# EAGLE board card (EAGLE 9.6.2)
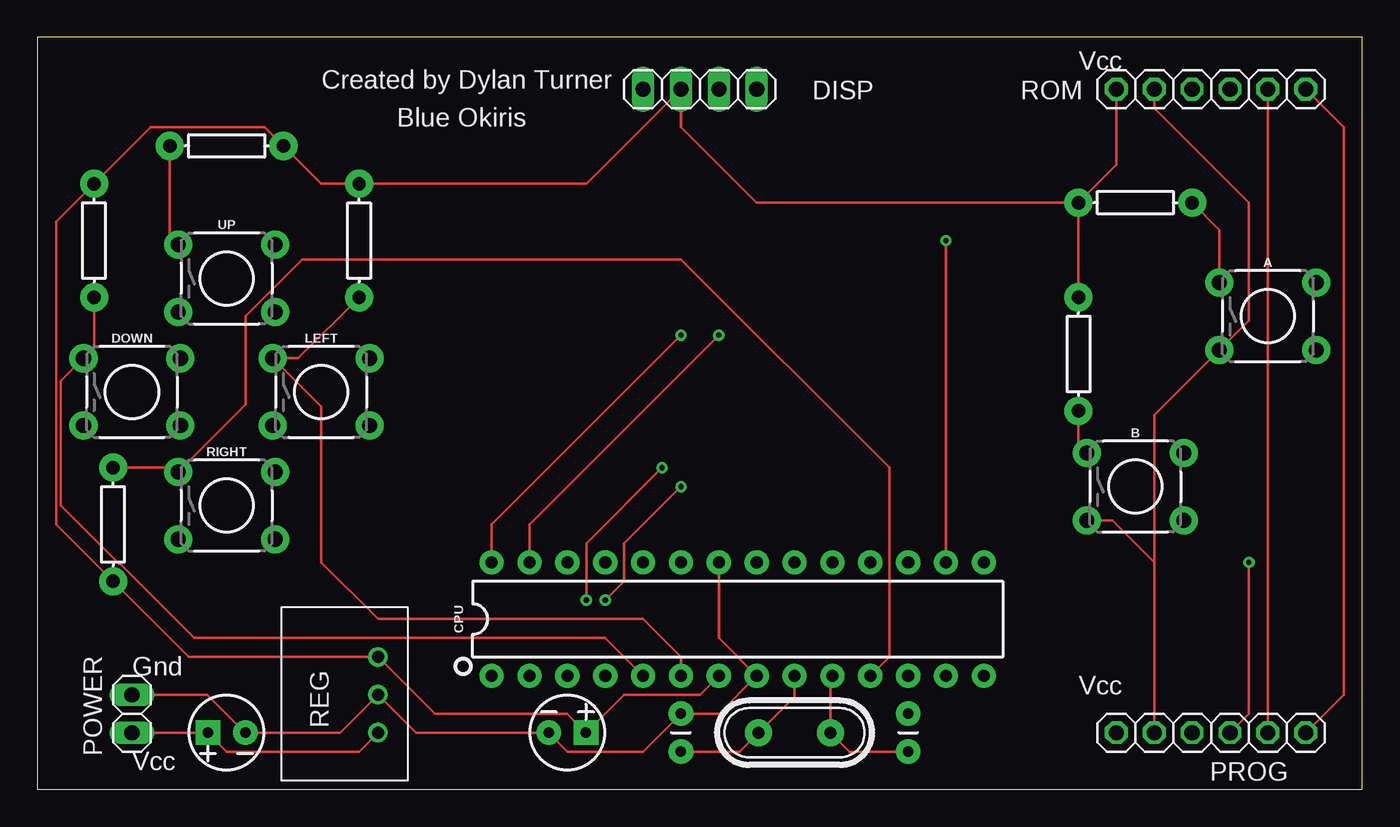
[diagram p0: board, top side]
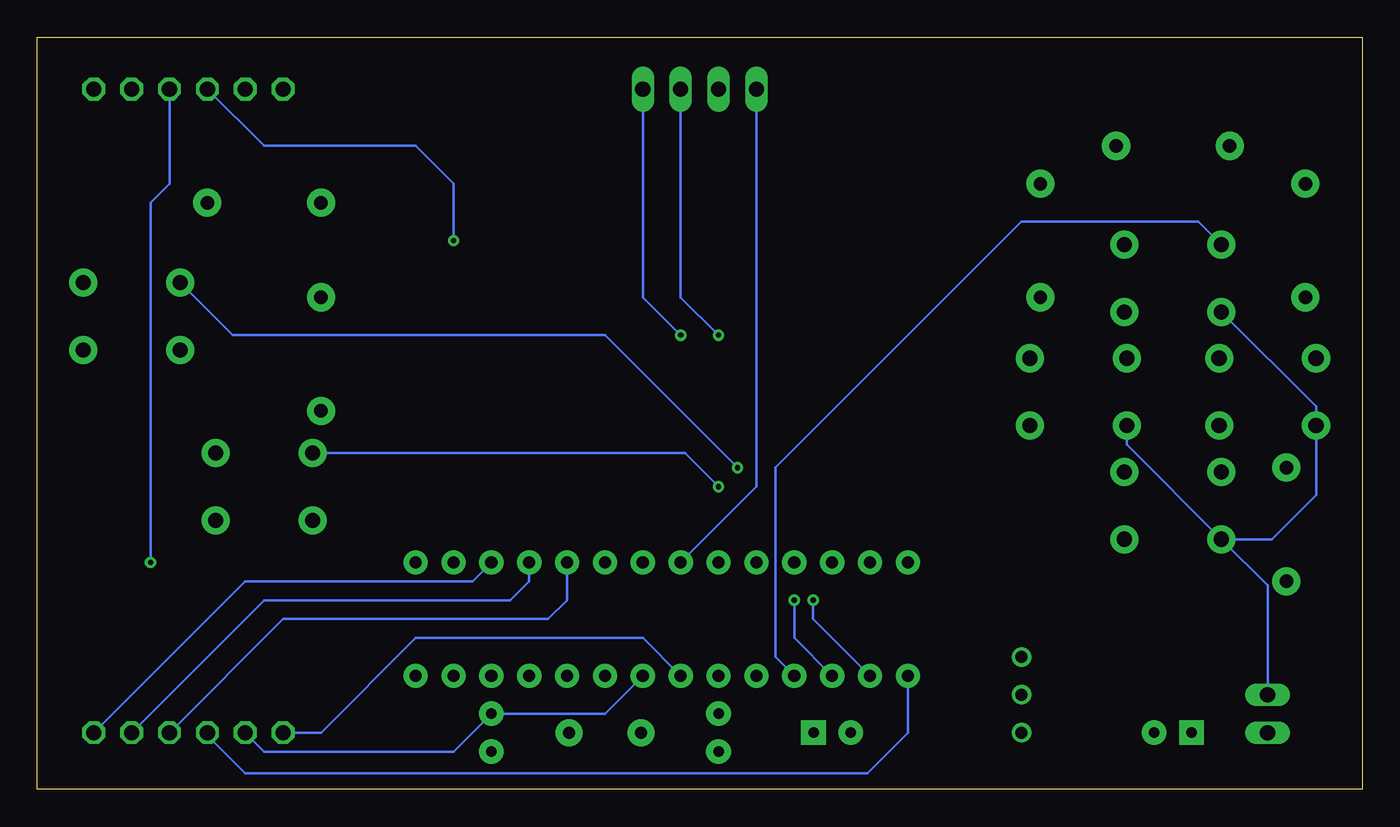
[diagram p1: board, bottom side, seen from below]

Size 88.88 x 50.47 mm. Coordinates in mm from the lower left corner, seen from the top.
Outline: 0,0 88.88,0 88.88,50.47 0,50.47 0,0
Copper layers (1*16): Top 0.035mm / dielectric 1.5mm / Bottom 0.035mm
Design rules "default": minimum track width 6mil, minimum drill 0.35mm, track to track 6mil, track to pad 6mil, pad to pad 6mil, via to via 6mil, smd to smd 6mil, copper to edge 40mil, drill to drill 6mil, minimum pad ring 10mil, minimum via ring 8mil, stop-mask expansion 4mil, vias tented up to drill 0mil, thermal gap 10mil

## Footprints (pad centres in the part's own frame; a part is rotated, then mirrored left to right if it is on the bottom)
TACTILE_SWITCH_PTH_6.0MM = drill 1.016 pad 1.88: 1 -3.251,2.261; 2 3.251,2.261; 3 -3.251,-2.261; 4 3.251,-2.261
CPOL-RADIAL-2.5MM-5MM = drill 0.7 pad 1.651 square: 1 1.25,0 | drill 0.7 pad 1.651: 2 -1.25,0
CAP-PTH-2.54 = drill 0.7 pad 1.651: 1 -1.27,0; 2 1.27,0
DIP28 = drill 0.813 pad 1.626: 1 -16.51,-3.81; 2 -13.97,-3.81; 3 -11.43,-3.81; 4 -8.89,-3.81; 5 -6.35,-3.81; 6 -3.81,-3.81; 7 -1.27,-3.81; 8 1.27,-3.81; 9 3.81,-3.81; 10 6.35,-3.81; 11 8.89,-3.81; 12 11.43,-3.81; 13 13.97,-3.81; 14 16.51,-3.81; 15 16.51,3.81; 16 13.97,3.81; 17 11.43,3.81; 18 8.89,3.81; 19 6.35,3.81; 20 3.81,3.81; 21 1.27,3.81; 22 -1.27,3.81; 23 -3.81,3.81; 24 -6.35,3.81; 25 -8.89,3.81; 26 -11.43,3.81; 27 -13.97,3.81; 28 -16.51,3.81
1X04 = drill 1.016 long: 1 -3.81,0; 2 -1.27,0; 3 1.27,0; 4 3.81,0
1X02 = drill 1.016 long: 1 -1.27,0; 2 1.27,0
1X06 = drill 1.016 octagon: 1 -6.35,0; 2 -3.81,0; 3 -1.27,0; 4 1.27,0; 5 3.81,0; 6 6.35,0
AXIAL-0.3 = drill 0.9 pad 1.88: P$1 -3.81,0; P$2 3.81,0
DC-DC_CONVERTER_78XX = drill 0.8: GND 0,0; VIN -2.54,0; VOUT 2.54,0
HC49 = drill 0.813 pad 1.8: 1 -2.413,0; 2 2.413,0

## Placement (x,y rotation side)
A  MOMENTARY-SWITCH-SPST-PTH-6.0MM  [TACTILE_SWITCH_PTH_6.0MM]  82.55,31.75 0 top
B  MOMENTARY-SWITCH-SPST-PTH-6.0MM  [TACTILE_SWITCH_PTH_6.0MM]  73.66,20.32 0 top
C1  10uF  [CPOL-RADIAL-2.5MM-5MM]  35.56,3.81 0 top
C2  10uF  [CPOL-RADIAL-2.5MM-5MM]  12.7,3.81 180 top
C3  22pF  [CAP-PTH-2.54]  58.42,3.81 90 top
C4  22pF  [CAP-PTH-2.54]  43.18,3.81 90 top
CPU  328P  [DIP28]  46.99,11.43 0 top
DISP  [1X04]  44.45,46.99 0 top
DOWN  MOMENTARY-SWITCH-SPST-PTH-6.0MM  [TACTILE_SWITCH_PTH_6.0MM]  6.35,26.67 0 top
LEFT  MOMENTARY-SWITCH-SPST-PTH-6.0MM  [TACTILE_SWITCH_PTH_6.0MM]  19.05,26.67 0 top
POWER  [1X02]  6.35,5.08 270 top
PROG  [1X06]  78.74,3.81 0 top
R1  1k  [AXIAL-0.3]  5.08,17.78 270 top
R2  1k  [AXIAL-0.3]  21.59,36.83 90 top
R3  1k  [AXIAL-0.3]  3.81,36.83 90 top
R4  1k  [AXIAL-0.3]  12.7,43.18 0 top
R5  1k  [AXIAL-0.3]  69.85,29.21 90 top
R6  1k  [AXIAL-0.3]  73.66,39.37 180 top
REG  R-78E5.0-1.0  [DC-DC_CONVERTER_78XX]  22.86,6.35 90 top
RIGHT  MOMENTARY-SWITCH-SPST-PTH-6.0MM  [TACTILE_SWITCH_PTH_6.0MM]  12.7,19.05 0 top
ROM  [1X06]  78.74,46.99 0 top
UP  MOMENTARY-SWITCH-SPST-PTH-6.0MM  [TACTILE_SWITCH_PTH_6.0MM]  12.7,34.29 0 top
X1  CRYSTALS-NOGND-HC49  [HC49]  50.8,3.81 180 top

## Library data of the parts
A B DOWN LEFT RIGHT UP = SparkFun-Switches; PROD_ID: SWCH-08441; SF_SKU: COM-00097
C1 C2 = SparkFun-Capacitors; PROD_ID: CAP-08440
C3 C4 = SparkFun-Capacitors; PROD_ID: CAP-09128
CPU = SparkFun-IC-Microcontroller; PROD_ID: IC-09136
DISP POWER = pinhead
PROG ROM = adafruit
R1-R6 = SparkFun-Resistors; PROD_ID: RES-08380
REG = SparkFun-IC-Power; PROD_ID: COM-13655
X1 = IQD-Frequency-Products

## Nets
GND: A.3 B.3 C1.2 C2.2 C3.2 C4.2 CPU.8 CPU.22 DISP.1 DOWN.3 LEFT.3 POWER.1 PROG.2 REG.GND RIGHT.3 ROM.2 UP.3
N$1: CPU.17 PROG.6 ROM.6
N$2: CPU.18 PROG.5 ROM.5
N$3: CPU.19 PROG.4 ROM.4
N$4: CPU.1 PROG.3
N$5: A.1 CPU.2 R6.P$1
N$6: C2.1 POWER.2 REG.VIN
N$7: CPU.16 ROM.3
N$8: CPU.28 DISP.3
N$9: CPU.27 DISP.4
N$10: C4.1 CPU.9 X1.2
N$11: B.1 CPU.3 R5.P$1
N$12: CPU.4 R4.P$1 UP.1
N$13: CPU.5 DOWN.1 R3.P$1
N$14: CPU.6 LEFT.1 R2.P$1
N$15: CPU.11 R1.P$1 RIGHT.1
N$16: C3.1 CPU.10 X1.1
VCC: C1.1 CPU.7 DISP.2 PROG.1 R1.P$2 R2.P$2 R3.P$2 R4.P$2 R5.P$2 R6.P$2 REG.VOUT ROM.1

## Tracks (layer width: path | path; a pad name or v marks a point on that pad's centre or on a via)
GND
  Top 0.152: POWER.1 11.41,6.35 C2.2 20.32,3.81 REG.GND 25.4,3.81 C1.2 34.31,3.79 35.56,2.54 40.64,2.54 C4.2 45.72,5.08 CPU.8 45.72,10.16 CPU.22 | PROG.2 74.93,15.24 | 74.93,15.24 72.11,18.06 B.3 | 74.93,15.24 74.93,25.12 A.3 81.28,31.47 81.28,39.37 74.93,45.72 ROM.2
  Bottom 0.152: CPU.8 50.8,5.08 C3.2 60.96,2.54 73.66,2.54 PROG.2 | RIGHT.3 6.35,13.69 POWER.1 | RIGHT.3 15.8,23.14 LEFT.3 | RIGHT.3 6.07,16.79 3.1,19.76 DOWN.3 3.1,25.68 UP.3 | CPU.22 40.64,20.32 DISP.1
N$1
  Top 0.152: ROM.6 87.63,44.45 87.63,6.35 PROG.6
  Bottom 0.152: PROG.6 74.93,13.97 59.69,13.97 CPU.17
N$2
  Top 0.152: ROM.5 PROG.5
  Bottom 0.152: PROG.5 73.66,12.7 57.15,12.7 55.88,13.97 CPU.18
N$3  (via drill 0.35)
  Top 0.152: v81.28,15.24 81.28,5.08 PROG.4
  Bottom 0.152: PROG.4 72.39,11.43 54.61,11.43 53.34,12.7 CPU.19 | ROM.4 80.01,40.64 81.28,39.37 v81.28,15.24
N$4
  Bottom 0.152: CPU.1 30.48,3.81 33.2,1.09 74.93,1.09 77.47,3.63 PROG.3
N$5  (via drill 0.35)
  Top 0.152: A.1 79.3,37.54 R6.P$1 | v41.91,21.59 36.83,16.51 v36.83,12.7
  Bottom 0.152: A.1 75.77,30.48 50.8,30.48 v41.91,21.59 | v36.83,12.7 36.83,11.43 CPU.2
N$6
  Top 0.152: POWER.2 11.43,3.81 | 11.43,3.81 C2.1 | REG.VIN 21.59,2.54 12.7,2.54 11.43,3.81
N$7  (via drill 0.35)
  Top 0.152: CPU.16 v60.96,36.83
  Bottom 0.152: v60.96,36.83 60.96,40.64 63.5,43.18 73.66,43.18 ROM.3
N$8  (via drill 0.35)
  Top 0.152: CPU.28 30.48,17.78 v43.18,30.48
  Bottom 0.152: v43.18,30.48 45.72,33.02 DISP.3
N$9  (via drill 0.35)
  Top 0.152: CPU.27 33.02,17.78 v45.72,30.48
  Bottom 0.152: v45.72,30.48 48.26,33.02 DISP.4
N$10
  Top 0.152: CPU.9 50.8,6.22 X1.2 47.12,2.54 C4.1
N$11  (via drill 0.35)
  Top 0.152: B.1 69.85,23.14 R5.P$1 | v43.18,20.32 39.37,16.51 39.37,13.97 v38.1,12.7
  Bottom 0.152: B.1 45.44,22.58 v43.18,20.32 | v38.1,12.7 38.1,10.16 CPU.3
N$12
  Top 0.152: UP.1 8.89,37.11 R4.P$1
  Bottom 0.152: UP.1 11,38.1 22.86,38.1 39.37,21.59 39.37,8.89 CPU.4
N$13
  Top 0.152: R3.P$1 3.81,29.64 DOWN.1 1.57,27.41 1.57,19.05 5.49,15.14 5.56,15.14 10.54,10.16 38.1,10.16 CPU.5
N$14
  Top 0.152: R2.P$1 17.5,28.93 LEFT.1 19.05,25.68 19.05,15.24 22.86,11.43 40.64,11.43 43.18,8.89 CPU.6
N$15
  Top 0.152: R1.P$1 9.17,21.59 RIGHT.1 13.97,25.83 13.97,31.75 17.78,35.56 43.18,35.56 57.15,21.59 57.15,8.89 CPU.11
N$16
  Top 0.152: CPU.10 53.21,7.49 X1.1 54.48,2.54 C3.1
VCC
  Top 0.152: CPU.7 44.45,6.35 39.35,6.35 C1.1 35.54,5.08 26.67,5.08 REG.VOUT 10.16,8.89 R1.P$2 1.27,17.78 1.27,38.1 R3.P$2 7.62,44.45 15.24,44.45 R4.P$2 19.05,40.64 R2.P$2 36.83,40.64 DISP.2 43.18,44.45 48.26,39.37 R6.P$2 | R5.P$2 R6.P$2 | R6.P$2 72.39,41.91 ROM.1
  Bottom 0.152: PROG.1 69.85,3.81 63.5,10.16 48.26,10.16 CPU.7

## Text on the board
tNames: Vcc | Created by Dylan Turner | Blue Okiris | Gnd | Vcc | Vcc
tTest: Game Card